# Altium PCB TransBoard.PcbDoc
Units mm, origin at the board's own origin, x right, y up, seen from the top; angles counter-clockwise.
Board outline 35.05 x 52.7 mm, 2 copper layers (Top Layer, Bottom Layer); 12 components, 14 nets, 58 pads, 0 vias.
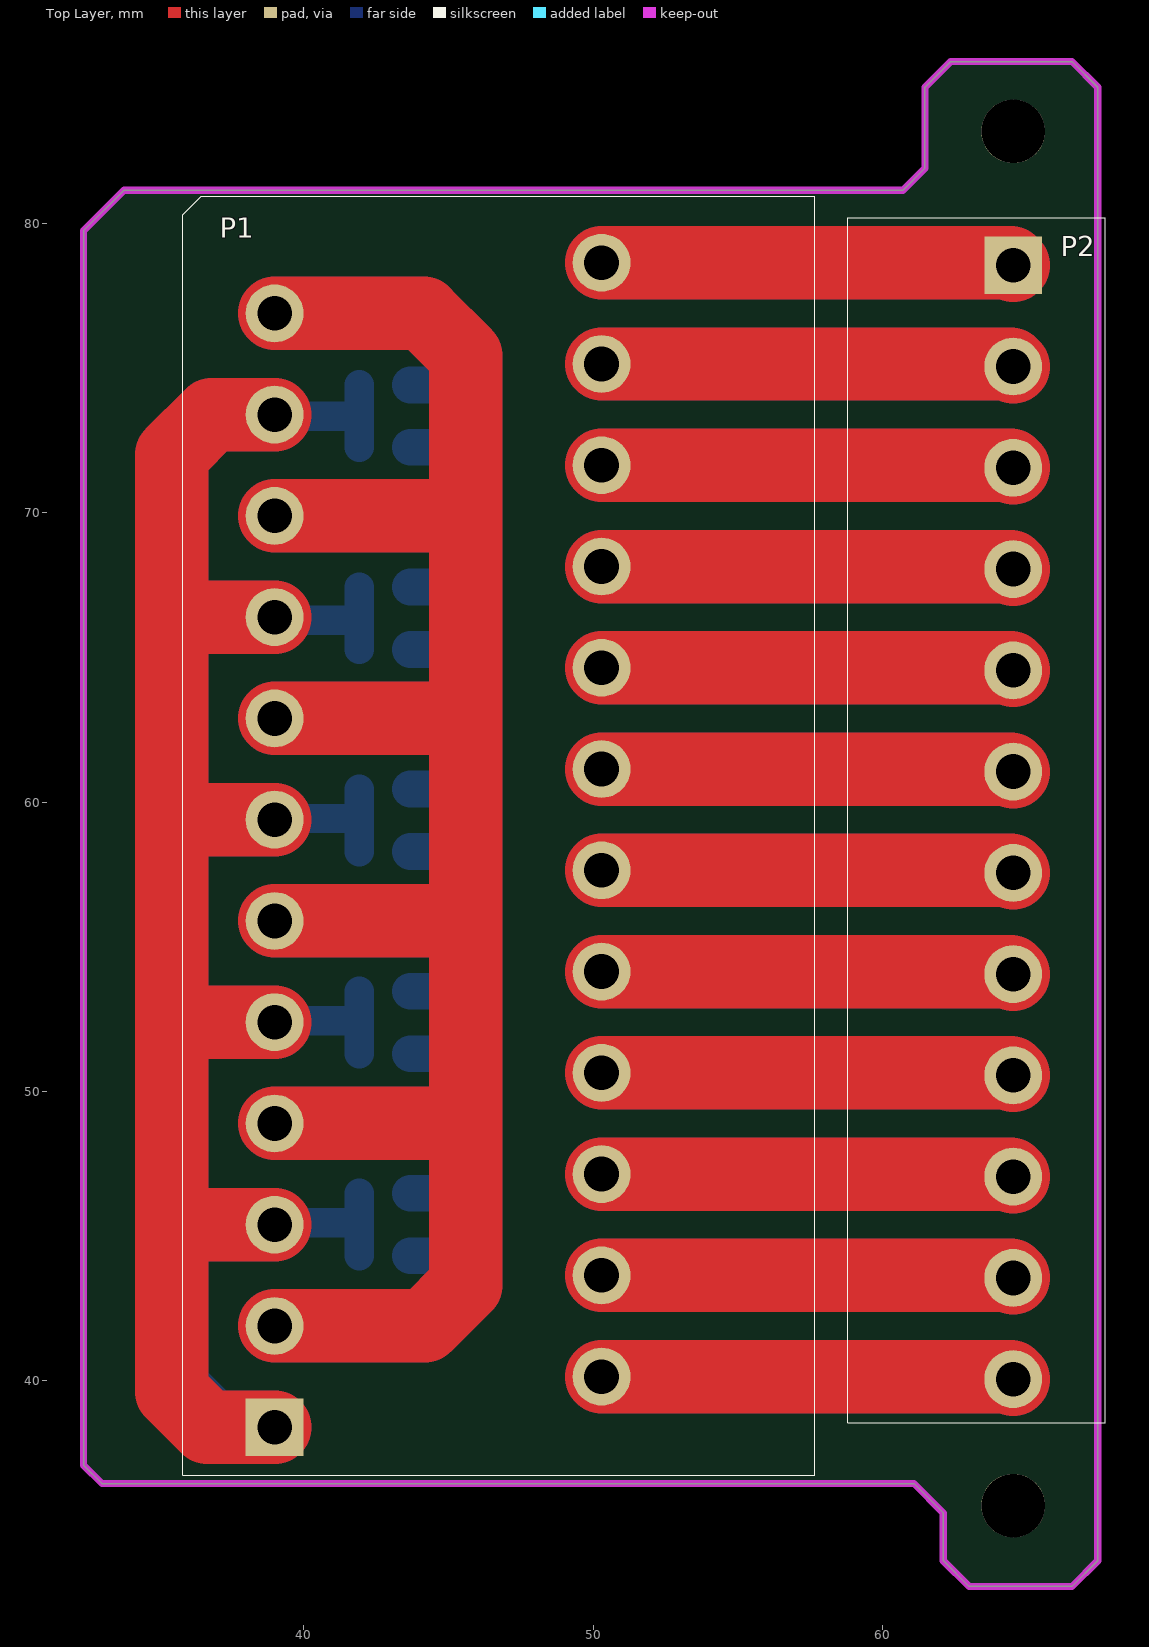
[diagram p0: Top Layer view]
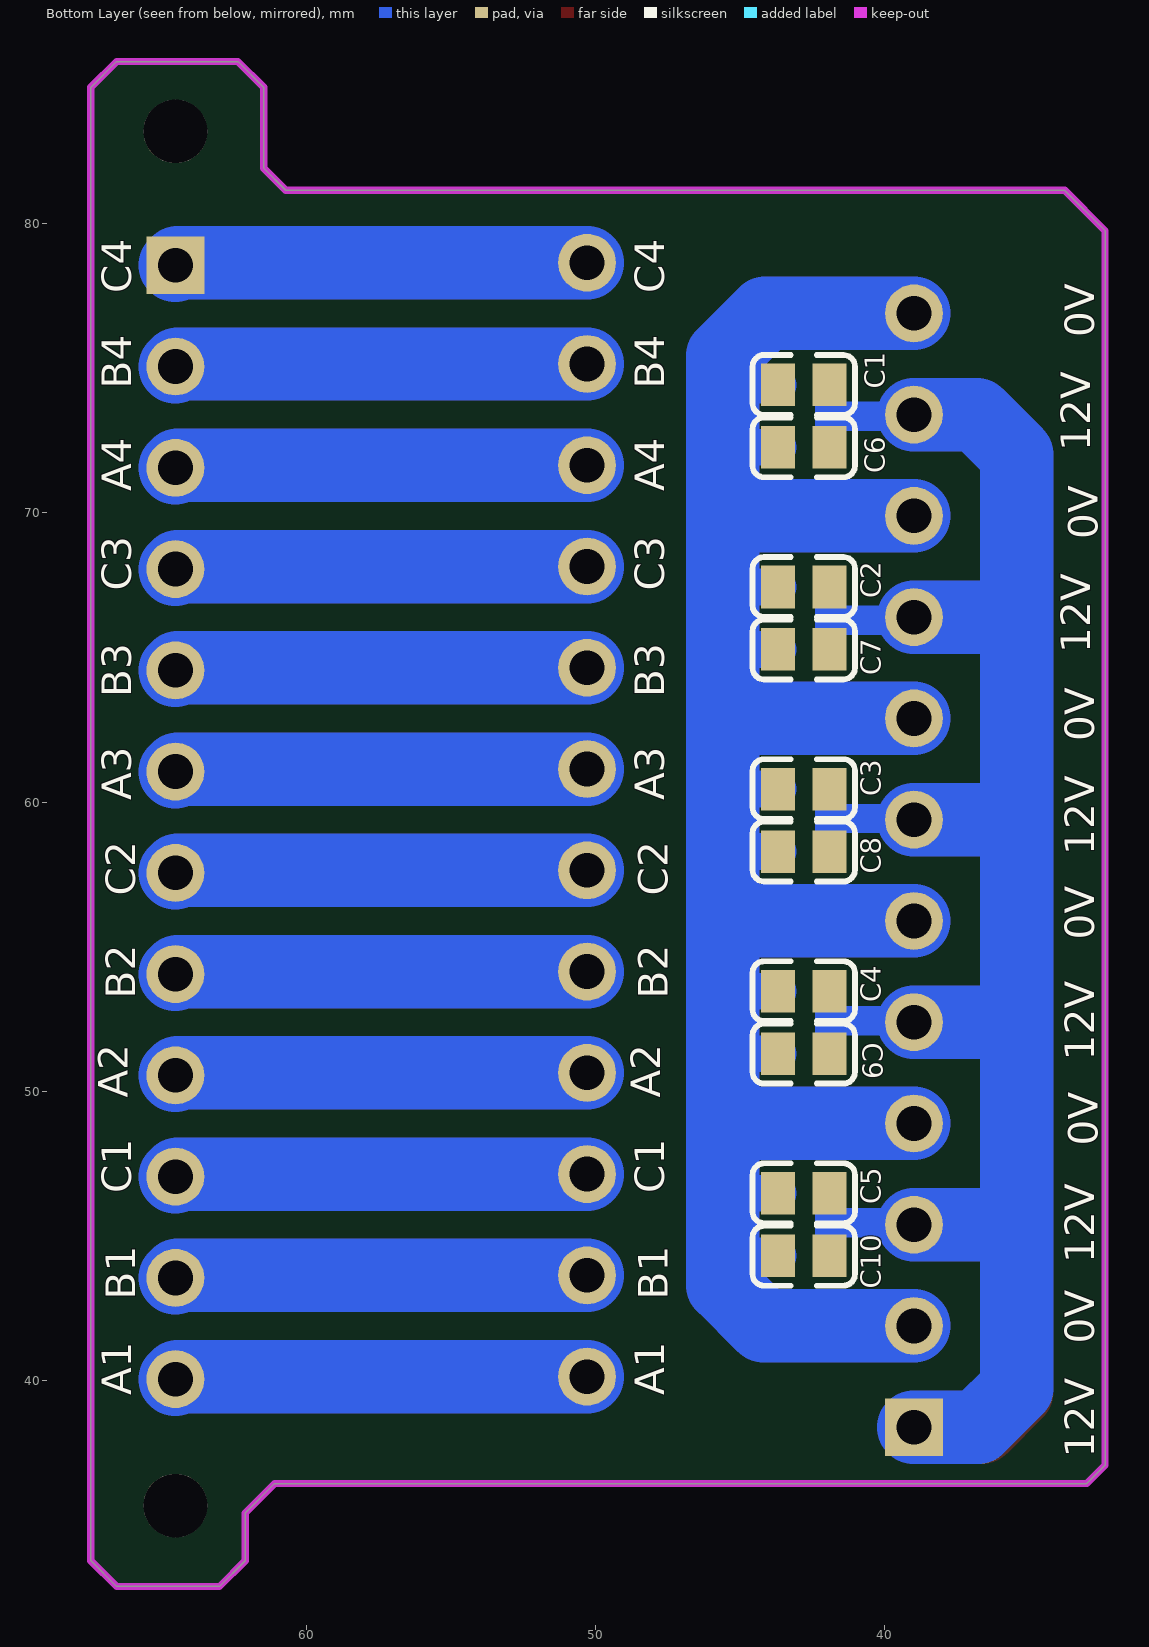
[diagram p1: Bottom Layer view, seen from below]
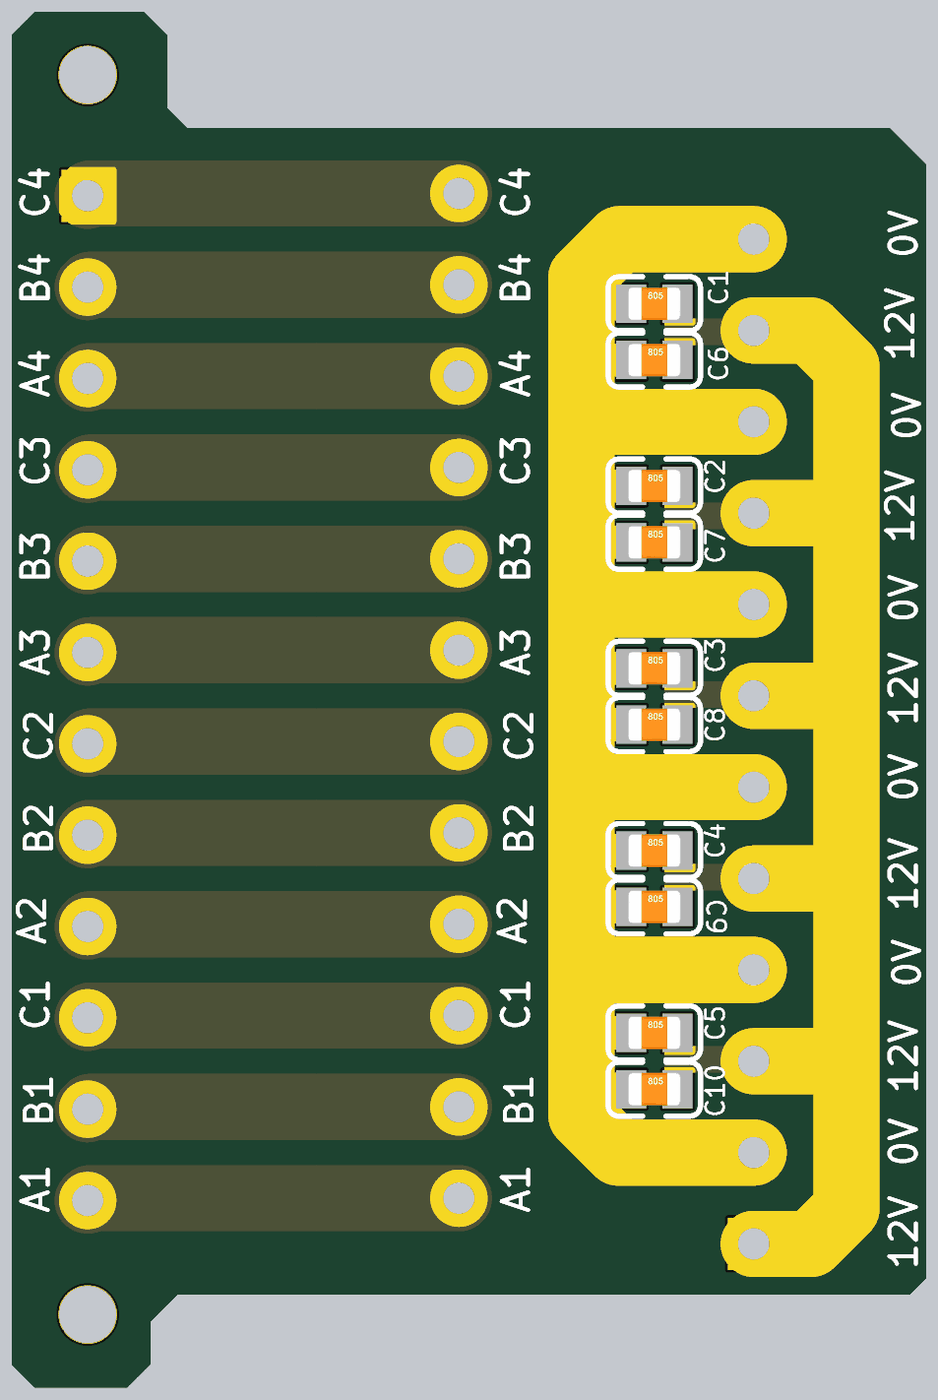
[diagram p2: 3D render of the assembled board from below, using the file's embedded part models]

## Layer stack, top to bottom
Top Solder: solder mask 0.0102, Solder Resist, Dk 3.5
Top Layer: signal copper 0.0356
Dielectric 1: dielectric 0.32, FR-4, Dk 4.8
Bottom Layer: signal copper 0.0356
Bottom Solder: solder mask 0.0102, Solder Resist, Dk 3.5

## Board outline
33.02,36.449 61.087,36.449 62.103,35.433 62.103,33.782 62.992,32.893 66.548,32.893 67.437,33.782 67.437,84.709 66.548,85.598 62.357,85.598 61.468,84.709 61.468,81.915 60.706,81.153 33.782,81.153 32.385,79.756 32.385,37.084

## Design rules (kind name [scope] priority, off if disabled: settings)
Clearance [All] p1: gap=0.254 ignorepadtopadclearanceinfootprint=FALSE except(0: Arc-Hole Track-Hole SMDPad-Hole THPad-Hole Via-Hole Fill-Hole Poly-Hole Region-Hole Text-Hole)
PolygonConnect [All] p1: connectstyle=Relief reliefconductorwidth=0.254 reliefentries=4 polygonreliefangle="90 Angle" airgapwidth=0.254
RoutingVias [All] p1: holewidth=0.711 width=1.27 viastyle="Through Hole" minholewidth=0.711 minwidth=1.27 maxholewidth=0.711 maxwidth=1.27
SolderMaskExpansion [All] p1: expansion=0.102
Width [All] p1: maxlimit=5.08 minlimit=0.254 preferedwidth=0.254
30 further rules are at their usual default settings.

## Components (designator, comment, footprint, x,y, rotation, side; value= is the part's Value field where it differs from the comment)
C1 "22uF (226) 20% 25V" 0805_C 42.799,74.422 r180 bottom
C2 "22uF (226) 20% 25V" 0805_C 42.799,67.437 r180 bottom
C3 "22uF (226) 20% 25V" 0805_C 42.799,60.452 r180 bottom
C4 "22uF (226) 20% 25V" 0805_C 42.799,53.467 r180 bottom
C5 "22uF (226) 20% 25V" 0805_C 42.799,46.482 r180 bottom
C6 "0.1uF (104) 10% 50V" 0805_C 42.799,72.263 r180 bottom value=104
C7 "0.1uF (104) 10% 50V" 0805_C 42.799,65.278 r180 bottom value=104
C8 "0.1uF (104) 10% 50V" 0805_C 42.799,58.293 r180 bottom value=104
C9 "0.1uF (104) 10% 50V" 0805_C 42.799,51.308 r180 bottom value=104
C10 "0.1uF (104) 10% 50V" 0805_C 42.799,44.323 r180 bottom value=104
P1 "Header 12X2A" KF128A 38.989,38.395 r90 top
P2 "Header 12" "KF128A 单排" 64.516,78.557 r270 top

## Footprints (in the part's own frame and the unit in brackets; to place one, negate y for a bottom-side part, rotate by r counter-clockwise, add the part's x,y. Pads: shape width x height; smd on the part's side, far side on the other; paste and mask are expansions set on the pad)
0805_C [mm]
  rect 1.16x1.47 smd: 1(-0.89,0) 2(0.89,0)
  silkscreen extent -1.77,-1.04 1.77,1.04, body extent -1,-0.63 1,0.63, height 0.77
KF128A [mm]
  rect 2x2 hole 1.2: 1(0,0)
  round 2 hole 1.2: 2(3.5,0) 3(7,0) 4(10.5,0) 5(14,0) 6(17.5,0) 7(21,0) 8(24.5,0) 9(28,0) 10(31.5,0) 11(35,0) 12(38.5,0) 13(1.75,-11.3) 14(5.25,-11.3) 15(8.75,-11.3) 16(12.25,-11.3) 17(15.75,-11.3) 18(19.25,-11.3) 19(22.75,-11.3) 20(26.25,-11.3) 21(29.75,-11.3) 22(33.25,-11.3) 23(36.75,-11.3) 24(40.25,-11.3)
  silkscreen extent -1.65,-18.67 42.55,3.18
"KF128A 单排" [mm]
  rect 2x2 hole 1.2: 1(0,0)
  round 2 hole 1.2: 2(3.5,0) 3(7,0) 4(10.5,0) 5(14,0) 6(17.5,0) 7(21,0) 8(24.5,0) 9(28,0) 10(31.5,0) 11(35,0) 12(38.5,0)
  silkscreen extent -1.65,-5.71 40,3.18

## Part data
C1 C2 C3 C4 C5: library part "0805 22uF (226) 20% 25V", "贴片电容", Package=0805, SuppliersPartNumber=C45783, ComponentLink1Description=供应商链接, ComponentLink1URL=http://www.szlcsc.com/product/details_46786.html, Supplier=LC
C6 C7 C8 C9 C10: library part Cap, "Capacitor", LatestRevisionDate=17-Jul-2002, LatestRevisionNote="Re-released for DXP Platform.", PackageDescription="Radial Cap, Thru-Hole; 2 Leads; 0.3 in Pin Spacing", PackageReference=RAD-0.3, Published=8-Jun-2000, Publisher="Altium Limited"
P1: "Header, 12-Pin, Dual row", LatestRevisionDate=17-Jul-2002, LatestRevisionNote="Re-released for DXP Platform.", Publisher="Altium Limited"
P2: "Header, 12-Pin", LatestRevisionDate=17-Jul-2002, LatestRevisionNote="Re-released for DXP Platform.", Publisher="Altium Limited"

## Free pads (board coordinates)
  round 2.2 hole 2.2: 2(64.516,83.185) 3(64.516,35.687)

## Nets (pads, with @x,y where several pads share a name; then routed paths per layer and width w, separated by ;. In a path a pad name is that pad's centre, name@x,y a point inside that pad or via, vN(x,y) a via of type N, cw(c..) or ccw(c..) an arc to the next point about the centre after c; other vN are vias at no path point)
12V+: C1.2 C2.2 C3.2 C4.2 C5.2 C6.2 C7.2 C8.2 C9.2 C10.2 P1.1 P1.3 P1.5 P1.7 P1.9 P1.11 | length 135.5
  Top Layer w2.54: P1.1 36.662,38.395 35.433,39.624 35.433,45.339 ; P1.3 35.489,45.395 35.433,45.339 ; P1.5 35.504,52.395 35.433,52.324 ; P1.7 35.773,59.395 35.433,59.055 ; P1.9 35.534,66.395 35.433,66.294 ; P1.11 36.819,73.395 35.433,72.009 35.433,66.294 ; 35.433,45.339 35.433,52.324 ; 35.433,52.324 35.433,59.055 ; 35.433,59.055 35.433,66.294
  Bottom Layer w1.016: P1.3 39.06,45.466 41.909,45.466 ; P1.5 39.045,52.451 41.909,52.451 ; P1.7 39.03,59.436 41.909,59.436 ; P1.9 39.09,66.294 41.909,66.294 ; P1.11 39.041,73.343 41.909,73.343 ; C10.2 41.909,45.466 ; C5.2 41.909,45.466 ; C9.2 41.909,52.451 ; C4.2 41.909,52.451 ; C8.2 41.909,59.436 ; C3.2 41.909,59.436 ; C7.2 41.909,66.294 ; C2.2 41.909,66.294 ; C6.2 41.909,73.343 ; C1.2 41.909,73.343
  Bottom Layer w2.54: P1.1 36.789,38.395 35.433,39.751 35.433,45.212 ; P1.3 35.616,45.395 35.433,45.212 ; P1.5 35.616,52.395 35.433,52.578 ; P1.7 35.646,59.395 35.433,59.182 ; P1.9 35.459,66.395 35.433,66.421 ; P1.11 36.819,73.395 35.433,72.009 35.433,66.421 ; 35.433,45.212 35.433,52.578 ; 35.433,52.578 35.433,59.182 ; 35.433,59.182 35.433,66.421
GND: C1.1 C2.1 C3.1 C4.1 C5.1 C6.1 C7.1 C8.1 C9.1 C10.1 P1.2 P1.4 P1.6 P1.8 P1.10 P1.12 | length 166.4
  Top Layer w2.54: P1.2 44.181,41.895 45.593,43.307 45.593,48.768 ; P1.4 45.466,48.895 45.593,48.768 ; P1.6 45.354,55.895 45.593,56.134 ; P1.8 45.309,62.895 45.593,62.611 ; P1.10 45.511,69.895 45.593,69.977 ; P1.12 44.136,76.895 45.593,75.438 45.593,69.977 ; 45.593,48.768 45.593,56.134 ; 45.593,56.134 45.593,62.611 ; 45.593,62.611 45.593,69.977
  Bottom Layer w1.27: C10.1 44.577,44.323 45.593,43.307 ; C5.1 45.339,46.482 45.593,46.228 ; C9.1 45.466,51.308 45.593,51.435 ; C4.1 45.466,53.467 45.593,53.34 ; C8.1 45.466,58.293 45.593,58.166 ; C3.1 45.466,60.452 45.593,60.325 ; C7.1 45.339,65.278 45.593,65.024 ; C2.1 45.593,67.437 ; C6.1 45.466,72.263 45.593,72.136 ; C1.1 45.212,74.422 45.593,74.041
  Bottom Layer w2.54: P1.2 44.181,41.895 45.593,43.307 45.593,46.228 45.593,49.022 ; P1.4 45.466,48.895 45.593,49.022 ; P1.6 45.578,55.895 45.593,55.88 ; P1.8 45.436,62.895 45.593,62.738 ; P1.10 45.548,69.895 45.593,69.85 ; P1.12 44.136,76.895 45.593,75.438 45.593,74.041 45.593,72.136 45.593,69.85 ; 45.593,49.022 45.593,51.435 45.593,53.34 45.593,55.88 ; 45.593,55.88 45.593,58.166 45.593,60.325 45.593,62.738 ; 45.593,62.738 45.593,65.024 45.593,67.437 45.593,69.85
M1A: P1.13 P2.12 | length 28.5
  Top Layer w2.54: P1.13 64.428,40.145 P2.12
  Bottom Layer w2.54: P1.13 64.428,40.145 P2.12
M1B: P1.14 P2.11 | length 28.5
  Top Layer w2.54: P1.14 64.428,43.645 P2.11
  Bottom Layer w2.54: P1.14 64.428,43.645 P2.11
M1C: P1.15 P2.10 | length 28.5
  Top Layer w2.54: P1.15 64.428,47.145 P2.10
  Bottom Layer w2.54: P1.15 64.428,47.145 P2.10
M2A: P1.16 P2.9 | length 28.5
  Top Layer w2.54: P1.16 64.428,50.645 P2.9
  Bottom Layer w2.54: P1.16 64.428,50.645 P2.9
M2B: P1.17 P2.8 | length 28.5
  Top Layer w2.54: P1.17 64.428,54.145 P2.8
  Bottom Layer w2.54: P1.17 64.428,54.145 P2.8
M2C: P1.18 P2.7 | length 28.5
  Top Layer w2.54: P1.18 64.428,57.645 P2.7
  Bottom Layer w2.54: P1.18 64.428,57.645 P2.7
M3A: P1.19 P2.6 | length 28.5
  Top Layer w2.54: P1.19 64.428,61.145 P2.6
  Bottom Layer w2.54: P1.19 64.428,61.145 P2.6
M3B: P1.20 P2.5 | length 28.5
  Top Layer w2.54: P1.20 64.428,64.645 P2.5
  Bottom Layer w2.54: P1.20 64.428,64.645 P2.5
M3C: P1.21 P2.4 | length 28.5
  Top Layer w2.54: P1.21 64.428,68.145 P2.4
  Bottom Layer w2.54: P1.21 64.428,68.145 P2.4
M4A: P1.22 P2.3 | length 28.5
  Top Layer w2.54: P1.22 64.428,71.645 P2.3
  Bottom Layer w2.54: P1.22 64.428,71.645 P2.3
M4B: P1.23 P2.2 | length 28.5
  Top Layer w2.54: P1.23 64.428,75.145 P2.2
  Bottom Layer w2.54: P1.23 64.428,75.145 P2.2
M4C: P1.24 P2.1 | length 28.5
  Top Layer w2.54: P1.24 64.428,78.645 P2.1
  Bottom Layer w2.54: P1.24 64.428,78.645 P2.1

## Keep-outs
Keep-Out Layer:
  lines w0.254: 32.385,37.084 33.02,36.449 59.817,36.449 60.452,36.449 61.087,36.449 62.103,35.433 62.103,33.782 62.992,32.893 63.373,32.893 66.548,32.893 67.437,33.782 67.437,84.709 66.548,85.598 62.357,85.598 61.468,84.709 61.468,81.915 60.706,81.153 33.782,81.153 32.385,79.756 32.385,37.084

## Silkscreen, mask and mechanical layers (free items; w line width, h text height)
Bottom Overlay:
  text "C4" at 47.625,77.597 h1.02 r270
  text "C4" at 66.04,77.597 h1.02 r270
  text "0V" at 32.766,76.073 h1.02 r270
  text "B4" at 47.625,74.295 h1.02 r270
  text "B4" at 66.04,74.295 h1.02 r270
  text "12V" at 32.893,72.136 h1.02 r270
  text "A4" at 47.625,70.739 h1.02 r270
  text "A4" at 66.04,70.739 h1.02 r270
  text "0V" at 32.639,69.088 h1.02 r270
  text "C3" at 47.625,67.31 h1.02 r270
  text "C3" at 66.04,67.31 h1.02 r270
  text "12V" at 32.893,65.151 h1.02 r270
  text "B3" at 47.625,63.627 h1.02 r270
  text "B3" at 66.04,63.627 h1.02 r270
  text "0V" at 32.766,62.103 h1.02 r270
  text "A3" at 47.625,60.071 h1.02 r270
  text "A3" at 66.04,60.071 h1.02 r270
  text "12V" at 32.766,58.166 h1.02 r270
  text "C2" at 47.498,56.769 h1.02 r270
  text "C2" at 65.913,56.769 h1.02 r270
  text "0V" at 32.766,55.245 h1.02 r270
  text "B2" at 47.498,53.213 h1.02 r270
  text "B2" at 65.913,53.213 h1.02 r270
  text "12V" at 32.766,51.054 h1.02 r270
  text "A2" at 47.752,49.784 h1.02 r270
  text "A2" at 66.167,49.784 h1.02 r270
  text "0V" at 32.639,48.133 h1.02 r270
  text "C1" at 47.625,46.482 h1.02 r270
  text "C1" at 66.04,46.482 h1.02 r270
  text "12V" at 32.766,44.069 h1.02 r270
  text "B1" at 47.498,42.799 h1.02 r270
  text "B1" at 65.913,42.799 h1.02 r270
  text "0V" at 32.766,41.275 h1.02 r270
  text "A1" at 47.625,39.497 h1.02 r270
  text "A1" at 66.04,39.497 h1.02 r270
  text "12V" at 32.766,37.338 h1.02 r270
Bottom Solder:
  lines w2.54: 38.989,38.395 36.789,38.395 35.433,39.751 35.433,45.212 ; 38.989,41.895 44.181,41.895 45.593,43.307 45.593,49.022 ; 38.989,45.395 35.616,45.395 35.433,45.212 ; 38.989,48.895 45.466,48.895 45.593,49.022 ; 38.989,52.395 35.616,52.395 35.433,52.578 ; 38.989,55.895 45.578,55.895 45.593,55.88 ; 38.989,59.395 35.646,59.395 35.433,59.182 ; 38.989,62.895 45.436,62.895 45.593,62.738 ; 38.989,66.395 35.459,66.395 35.433,66.421 ; 38.989,69.895 45.548,69.895 45.593,69.85 ; 38.989,73.395 36.819,73.395 35.433,72.009 35.433,66.421 ; 38.989,76.895 44.136,76.895 45.593,75.438 45.593,69.85 ; 35.433,45.212 35.433,52.578 ; 35.433,52.578 35.433,59.182 ; 35.433,59.182 35.433,66.421 ; 45.593,49.022 45.593,55.88 ; 45.593,55.88 45.593,62.738 ; 45.593,62.738 45.593,69.85